# Altium PCB LED Module.PcbDoc
Units mm, origin at the board's own origin, x right, y up, seen from the top; angles counter-clockwise.
Board outline 86 x 72 mm, 2 copper layers (Top Layer, Bottom Layer), stack 1.571 mm thick; 116 components, 86 nets, 402 pads, 81 vias.
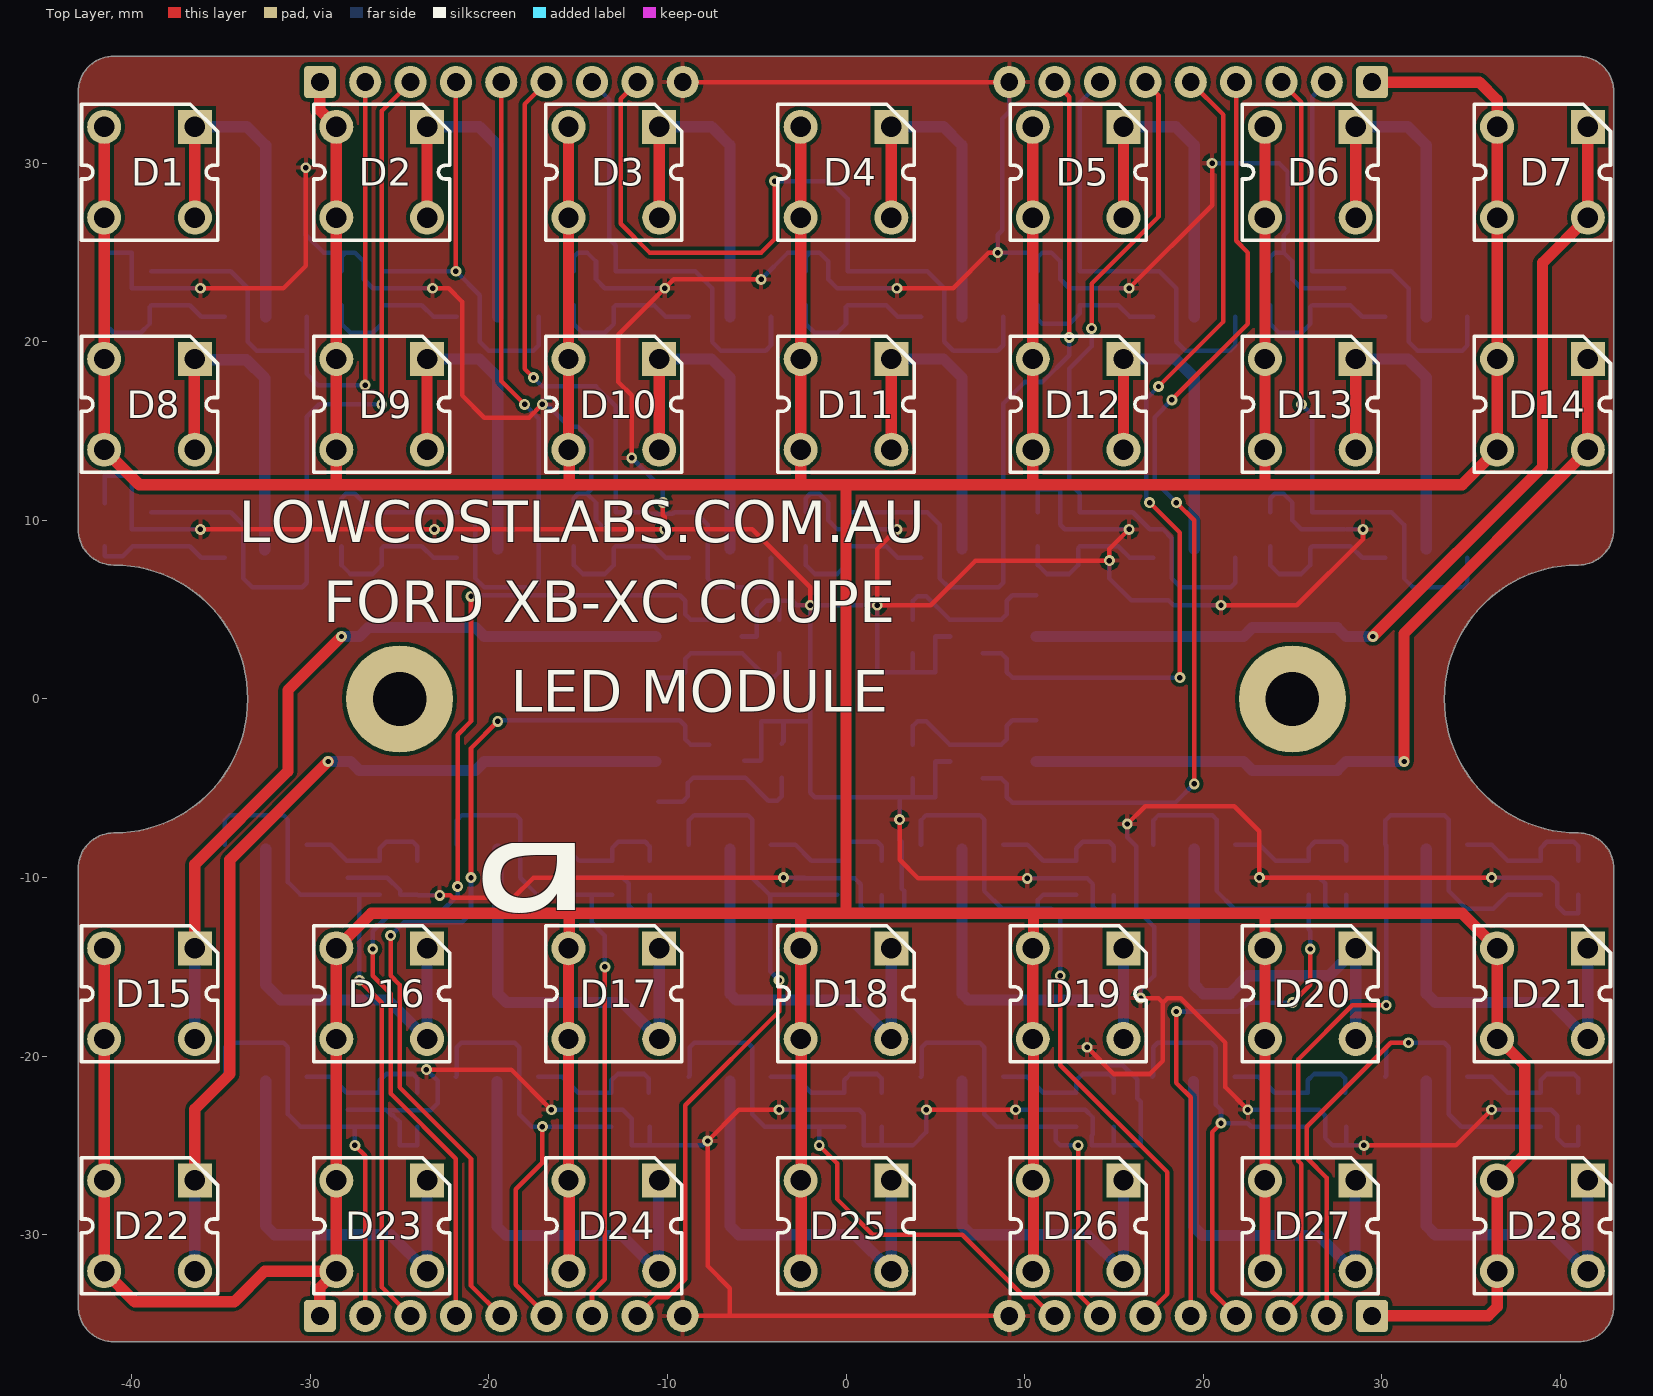
[diagram p0: Top Layer view]
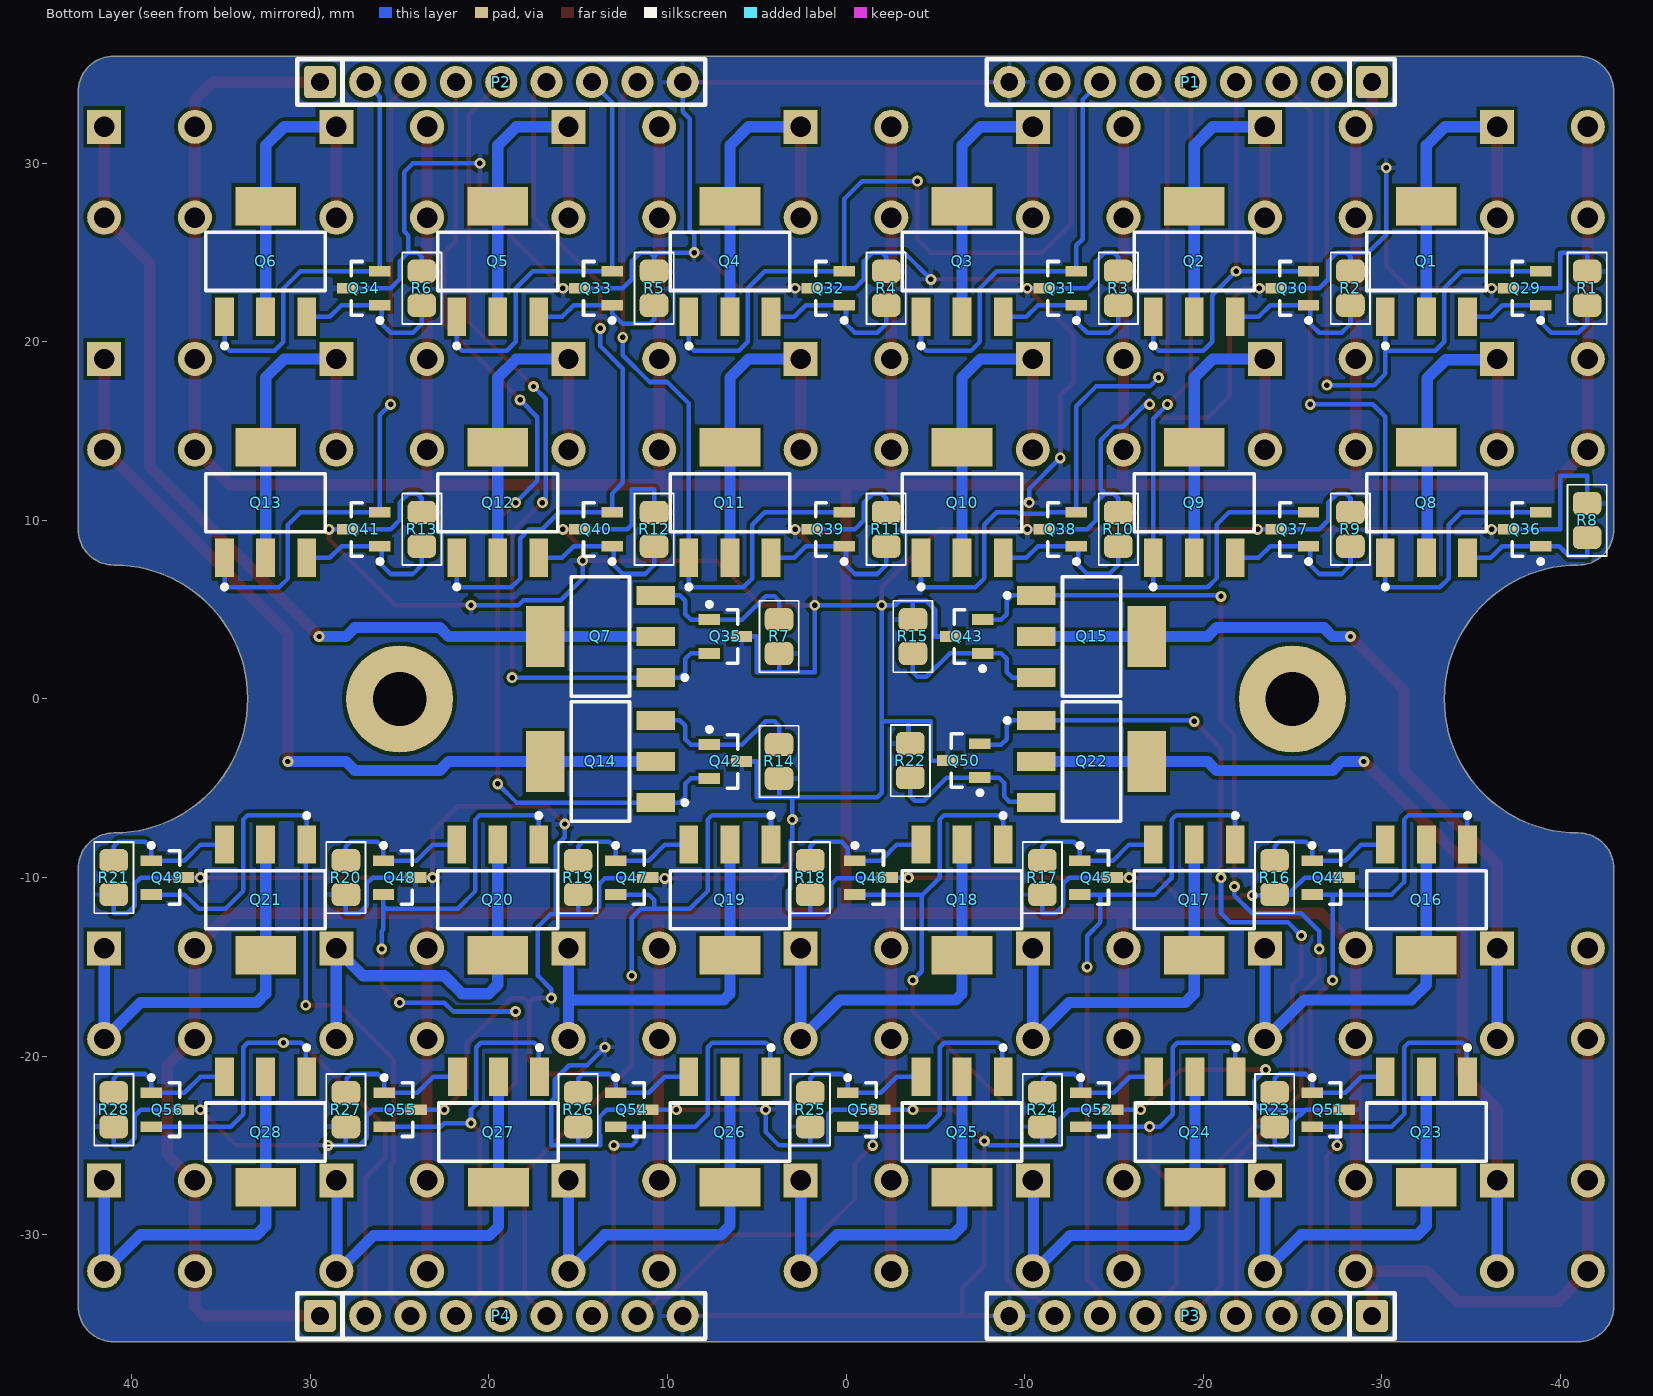
[diagram p1: Bottom Layer view, seen from below]
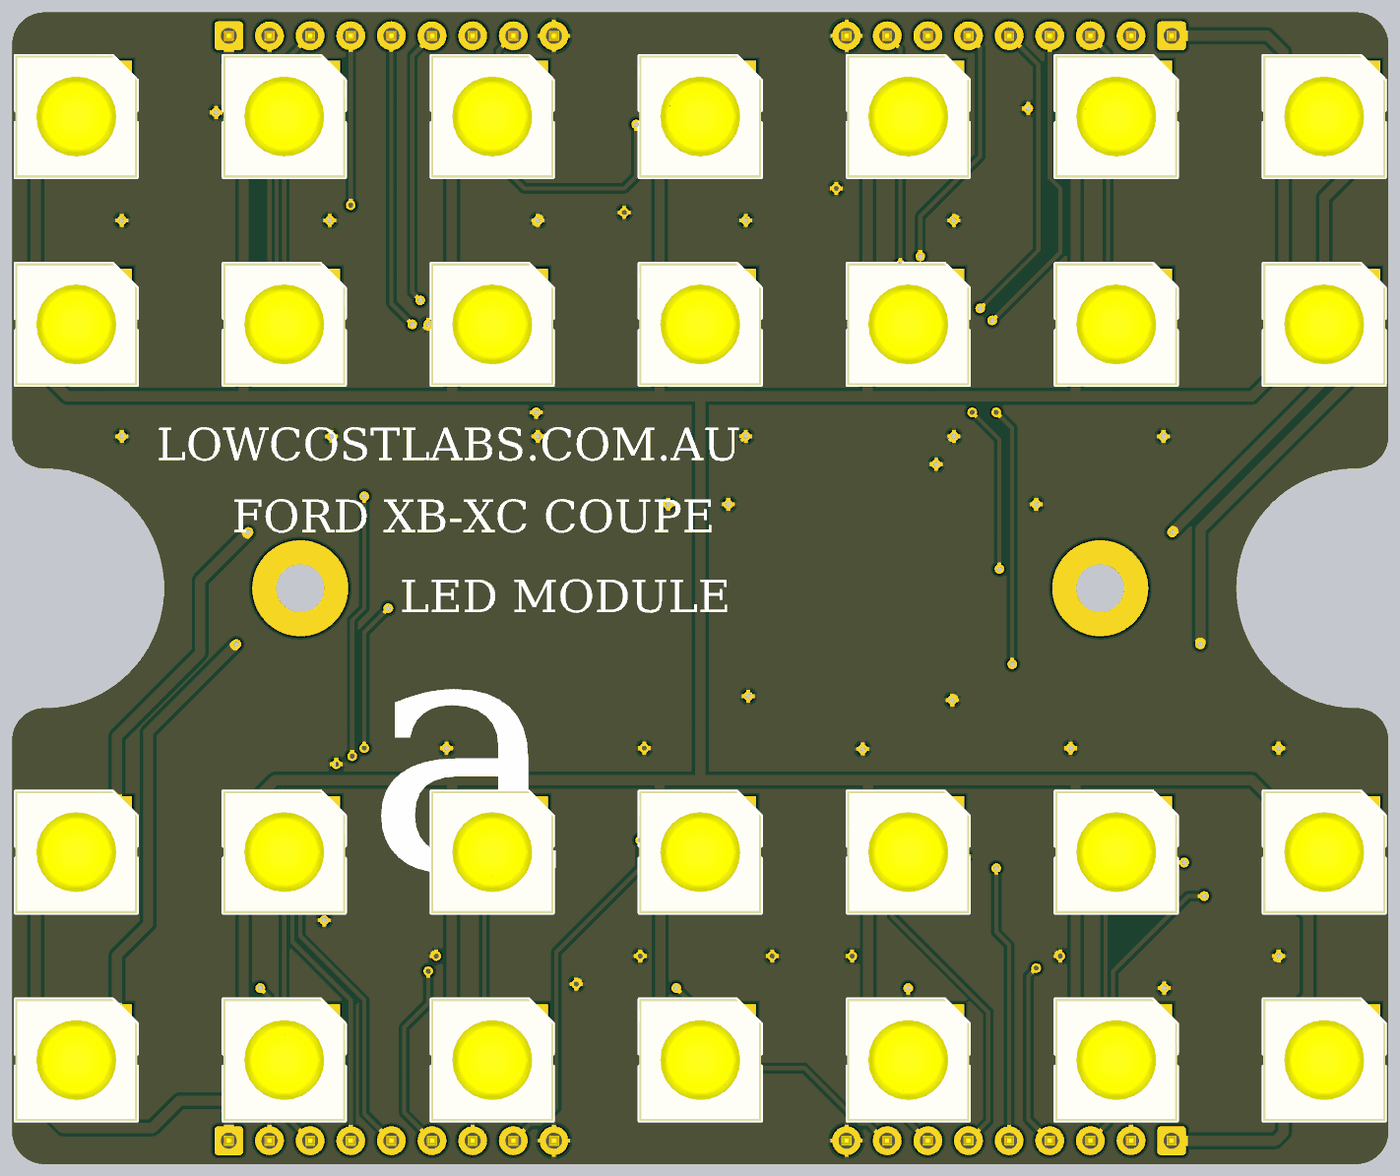
[diagram p2: 3D render of the assembled board from above, using the file's embedded part models]
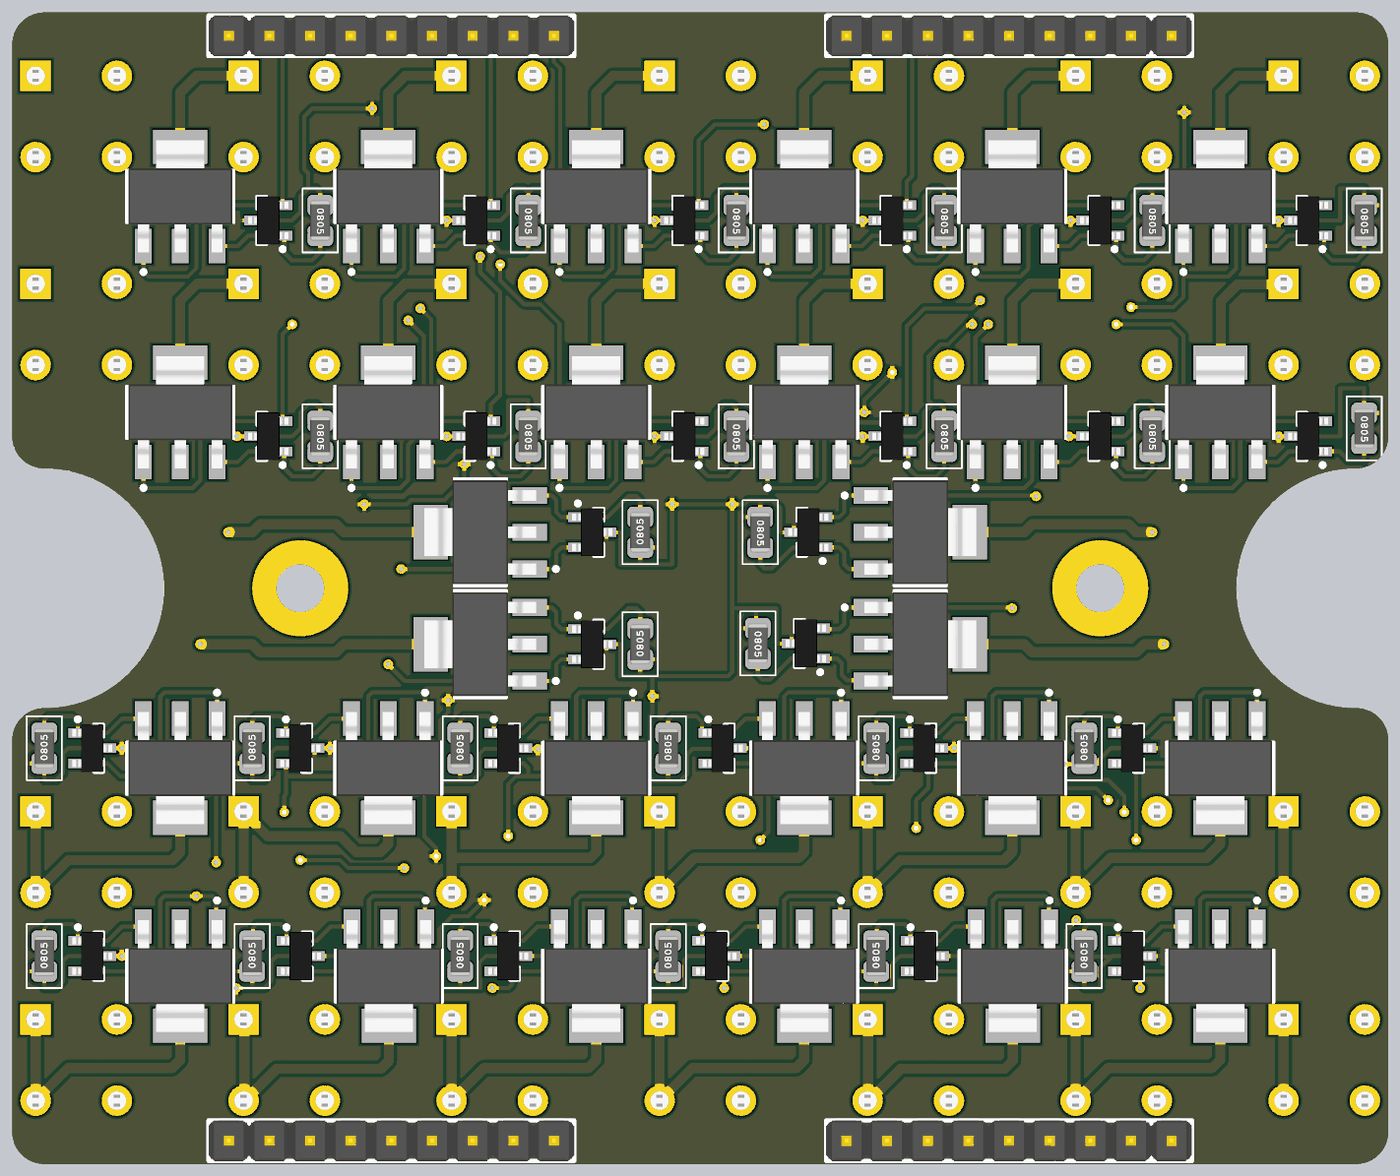
[diagram p3: 3D render of the assembled board from below, using the file's embedded part models]

## Layer stack, top to bottom
Top Solder: solder mask 0.0102, Solder Resist, Dk 3.5
Top Layer: signal copper 0.0356
Dielectric 1: dielectric 1.5, FR-4, Dk 4.8
Bottom Layer: signal copper 0.0356
Bottom Solder: solder mask 0.0102, Solder Resist, Dk 3.5

## Board outline
-43,-34 -43,-9.5 cw(c-41,-9.5) -41,-7.5 ccw(c-41,0) -41,7.5 cw(c-41,9.5) -43,9.5 -43,34 cw(c-41,34) -41,36 41,36 cw(c41,34) 43,34 43,33.5 43,9.5 cw(c41,9.5) 41,7.5 ccw(c41,0) 41,-7.5 cw(c41,-9.5) 43,-9.5 43,-34 cw(c41,-34) 41,-36 -41,-36 cw(c-41,-34)

## Design rules (kind name [scope] priority, off if disabled: settings)
Clearance [All] p1: gap=0.203
PolygonConnect [All] p1: connectstyle=Relief reliefconductorwidth=0.254 reliefentries=4 polygonreliefangle="90 Angle" airgapwidth=0.254
RoutingVias [All] p1: holewidth=0.305 width=0.61 viastyle="Through Hole" minholewidth=0.305 minwidth=0.61 maxholewidth=0.711 maxwidth=1.27
SolderMaskExpansion [All] p1: expansion=0.102
Width [All] p1: maxlimit=2.54 minlimit=0.203 preferedwidth=0.254
30 further rules are at their usual default settings.

## Classes and differential pairs
component class "XC Tail Lights": P1 P2 P3 P4
component class "Current Sinks": Q1 Q2 Q3 Q4 Q5 Q6 Q7 Q8 Q9 Q10 Q11 Q12 Q13 Q14 Q15 Q16 Q17 Q18 Q19 Q20 Q21 Q22 Q23 Q24 Q25 Q26 Q27 Q28 Q29 Q30 Q31 Q32 Q33 Q34 Q35 Q36 Q37 Q38 Q39 Q40 Q41 Q42 Q43 Q44 Q45 Q46 Q47 Q48 Q49 Q50 Q51 Q52 Q53 Q54 Q55 Q56 R1 R2 R3 R4 R5 R6 R7 R8 R9 R10 R11 R12 R13 R14 R15 R16 R17 R18 R19 R20 R21 R22 R23 R24 R25 R26 R27 R28
component class "LED Module": D1 D2 D3 D4 D5 D6 D7 D8 D9 D10 D11 D12 D13 D14 D15 D16 D17 D18 D19 D20 D21 D22 D23 D24 D25 D26 D27 D28

## Components (designator, comment, footprint, x,y, rotation, side; value= is the part's Value field where it differs from the comment)
D1 "AMBER" "CREE P4 YELLOW" -39,29.5 r270 top
D2 "AMBER" "CREE P4 YELLOW" -26,29.5 r270 top
D3 "AMBER" "CREE P4 YELLOW" -13,29.5 r270 top
D4 "AMBER" "CREE P4 YELLOW" 0,29.5 r270 top
D5 "AMBER" "CREE P4 YELLOW" 13,29.5 r270 top
D6 "AMBER" "CREE P4 YELLOW" 26,29.5 r270 top
D7 "AMBER" "CREE P4 YELLOW" 39,29.5 r270 top
D8 "AMBER" "CREE P4 YELLOW" -39,16.5 r270 top
D9 "AMBER" "CREE P4 YELLOW" -26,16.5 r270 top
D10 "AMBER" "CREE P4 YELLOW" -13,16.5 r270 top
D11 "AMBER" "CREE P4 YELLOW" 0,16.5 r270 top
D12 "AMBER" "CREE P4 YELLOW" 13,16.5 r270 top
D13 "AMBER" "CREE P4 YELLOW" 26,16.5 r270 top
D14 "AMBER" "CREE P4 YELLOW" 39,16.5 r270 top
D15 "AMBER" "CREE P4 YELLOW" -39,-16.5 r270 top
D16 "AMBER" "CREE P4 YELLOW" -26,-16.5 r270 top
D17 "AMBER" "CREE P4 YELLOW" -13,-16.5 r270 top
D18 "AMBER" "CREE P4 YELLOW" 0,-16.5 r270 top
D19 "AMBER" "CREE P4 YELLOW" 13,-16.5 r270 top
D20 "AMBER" "CREE P4 YELLOW" 26,-16.5 r270 top
D21 "AMBER" "CREE P4 YELLOW" 39,-16.5 r270 top
D22 "AMBER" "CREE P4 YELLOW" -39,-29.5 r270 top
D23 "AMBER" "CREE P4 YELLOW" -26,-29.5 r270 top
D24 "AMBER" "CREE P4 YELLOW" -13,-29.5 r270 top
D25 "AMBER" "CREE P4 YELLOW" 0,-29.5 r270 top
D26 "AMBER" "CREE P4 YELLOW" 13,-29.5 r270 top
D27 "AMBER" "CREE P4 YELLOW" 26,-29.5 r270 top
D28 "AMBER" "CREE P4 YELLOW" 39,-29.5 r270 top
P1 "Header 9" "HEADER 1X9" -19.304,34.544 r0 bottom
P2 "Header 9" "HEADER 1X9" 19.304,34.544 r180 bottom
P3 "Header 9" "HEADER 1X9" -19.304,-34.544 r0 bottom
P4 "Header 9" "HEADER 1X9" 19.304,-34.544 r180 bottom
Q1 "BCP56" SOT223 -32.5,24.5 r0 bottom
Q2 "BCP56" SOT223 -19.5,24.5 r0 bottom
Q3 "BCP56" SOT223 -6.5,24.5 r0 bottom
Q4 "BCP56" SOT223 6.5,24.5 r0 bottom
Q5 "BCP56" SOT223 19.5,24.5 r0 bottom
Q6 "BCP56" SOT223 32.5,24.5 r0 bottom
Q7 "BCP56" SOT223 13.75,3.5 r270 bottom
Q8 "BCP56" SOT223 -32.5,11 r0 bottom
Q9 "BCP56" SOT223 -19.5,11 r0 bottom
Q10 "BCP56" SOT223 -6.5,11 r0 bottom
Q11 "BCP56" SOT223 6.5,11 r0 bottom
Q12 "BCP56" SOT223 19.5,11 r0 bottom
Q13 "BCP56" SOT223 32.5,11 r0 bottom
Q14 "BCP56" SOT223 13.75,-3.5 r270 bottom
Q15 "BCP56" SOT223 -13.75,3.5 r90 bottom
Q16 "BCP56" SOT223 -32.5,-11.25 r180 bottom
Q17 "BCP56" SOT223 -19.5,-11.25 r180 bottom
Q18 "BCP56" SOT223 -6.5,-11.25 r180 bottom
Q19 "BCP56" SOT223 6.5,-11.25 r180 bottom
Q20 "BCP56" SOT223 19.5,-11.25 r180 bottom
Q21 "BCP56" SOT223 32.5,-11.25 r180 bottom
Q22 "BCP56" SOT223 -13.75,-3.5 r90 bottom
Q23 "BCP56" SOT223 -32.5,-24.25 r180 bottom
Q24 "BCP56" SOT223 -19.54,-24.25 r180 bottom
Q25 "BCP56" SOT223 -6.5,-24.25 r180 bottom
Q26 "BCP56" SOT223 6.5,-24.25 r180 bottom
Q27 "BCP56" SOT223 19.46,-24.25 r180 bottom
Q28 "BCP56" SOT223 32.5,-24.25 r180 bottom
Q29 "S8 050" SOT23-3L -38,23 r0 bottom
Q30 "S8 050" SOT23-3L -25,23 r0 bottom
Q31 "S8 050" SOT23-3L -12,23 r0 bottom
Q32 "S8 050" SOT23-3L 1,23 r0 bottom
Q33 "S8 050" SOT23-3L 14,23 r0 bottom
Q34 "S8 050" SOT23-3L 27,23 r0 bottom
Q35 "S8 050" SOT23-3L 6.75,3.5 r180 bottom
Q36 "S8 050" SOT23-3L -38,9.5 r0 bottom
Q37 "S8 050" SOT23-3L -25,9.5 r0 bottom
Q38 "S8 050" SOT23-3L -12,9.5 r0 bottom
Q39 "S8 050" SOT23-3L 1,9.5 r0 bottom
Q40 "S8 050" SOT23-3L 14,9.5 r0 bottom
Q41 "S8 050" SOT23-3L 27,9.5 r0 bottom
Q42 "S8 050" SOT23-3L 6.75,-3.5 r180 bottom
Q43 "S8 050" SOT23-3L -6.75,3.5 r0 bottom
Q44 "S8 050" SOT23-3L -27,-10 r180 bottom
Q45 "S8 050" SOT23-3L -14,-10 r180 bottom
Q46 "S8 050" SOT23-3L -1.4,-10 r180 bottom
Q47 "S8 050" SOT23-3L 12,-10 r180 bottom
Q48 "S8 050" SOT23-3L 25,-10 r180 bottom
Q49 "S8 050" SOT23-3L 38,-10 r180 bottom
Q50 "S8 050" SOT23-3L -6.6,-3.45 r0 bottom
Q51 "S8 050" SOT23-3L -27,-23 r180 bottom
Q52 "S8 050" SOT23-3L -14.04,-23 r180 bottom
Q53 "S8 050" SOT23-3L -1,-23 r180 bottom
Q54 "S8 050" SOT23-3L 12,-23 r180 bottom
Q55 "S8 050" SOT23-3L 24.96,-23 r180 bottom
Q56 "S8 050" SOT23-3L 38,-23 r180 bottom
R1 "9R1" "RESISTOR 0805" -41.5,23 r90 bottom
R2 "9R1" "RESISTOR 0805" -28.25,23 r90 bottom
R3 "9R1" "RESISTOR 0805" -15.25,23 r90 bottom
R4 "9R1" "RESISTOR 0805" -2.25,23 r90 bottom
R5 "9R1" "RESISTOR 0805" 10.75,23 r90 bottom
R6 "9R1" "RESISTOR 0805" 23.75,23 r90 bottom
R7 "9R1" "RESISTOR 0805" 3.75,3.5 r270 bottom
R8 "9R1" "RESISTOR 0805" -41.5,10 r90 bottom
R9 "9R1" "RESISTOR 0805" -28.25,9.5 r90 bottom
R10 "9R1" "RESISTOR 0805" -15.25,9.5 r90 bottom
R11 "9R1" "RESISTOR 0805" -2.25,9.5 r90 bottom
R12 "9R1" "RESISTOR 0805" 10.75,9.5 r90 bottom
R13 "9R1" "RESISTOR 0805" 23.75,9.5 r90 bottom
R14 "9R1" "RESISTOR 0805" 3.75,-3.5 r270 bottom
R15 "9R1" "RESISTOR 0805" -3.75,3.5 r90 bottom
R16 "9R1" "RESISTOR 0805" -24,-10 r270 bottom
R17 "9R1" "RESISTOR 0805" -11,-10 r270 bottom
R18 "9R1" "RESISTOR 0805" 2,-10 r270 bottom
R19 "9R1" "RESISTOR 0805" 15,-10 r270 bottom
R20 "9R1" "RESISTOR 0805" 28,-10 r270 bottom
R21 "9R1" "RESISTOR 0805" 41,-10 r270 bottom
R22 "9R1" "RESISTOR 0805" -3.6,-3.45 r90 bottom
R23 "9R1" "RESISTOR 0805" -24,-23 r270 bottom
R24 "9R1" "RESISTOR 0805" -11,-23 r270 bottom
R25 "9R1" "RESISTOR 0805" 2,-23 r270 bottom
R26 "9R1" "RESISTOR 0805" 15,-23 r270 bottom
R27 "9R1" "RESISTOR 0805" 28,-23 r270 bottom
R28 "9R1" "RESISTOR 0805" 41,-23 r270 bottom

## Footprints (in the part's own frame and the unit in brackets; to place one, negate y for a bottom-side part, rotate by r counter-clockwise, add the part's x,y. Pads: shape width x height; smd on the part's side, far side on the other; paste and mask are expansions set on the pad)
"CREE P4 YELLOW" [mil] "CREE P4 YELLOW"
  rect 75x75 hole 45: 1(-100,100)
  round 75 hole 45: 2(-100,-100) 3(100,-100) 4(100,100)
  silkscreen extent -150,-150 150,150, body extent -150,-150 150,150, height 272
"HEADER 1X9" [mm]
  rrect25% 1.8x1.8 hole 1: 1(-10.16,0)
  round 1.8 hole 1: 2(-7.62,0) 3(-5.08,0) 4(-2.54,0) 5(0,0) 6(2.54,0) 7(5.08,0) 8(7.62,0) 9(10.16,0)
  silkscreen extent -11.43,-1.27 11.43,1.27, body extent -11.43,-1.27 11.43,1.27, height 9.5
"RESISTOR 0805" [mm]
  rrect50% 1.3x1.6 smd: 1(0.95,0) 2(-0.95,0)
  silkscreen extent -2,-1.1 2,1.1, body extent -1.25,-0.62 1.25,0.62, height 0.8
SOT23-3L [mm] "SOT23, 3-Leads, Body 2.9x1.3mm, Pitch 0.95mm, Lead Span 2.5mm, IPC High Density"
  rect 1.2x0.6 smd: 1(-0.9,0.95) 2(-0.9,-0.95) 3(0.9,0)
  silkscreen extent -1.02,-1.5 0.7,1.92, body extent -1.25,-1.5 1.25,1.5, height 1.12
SOT223 [mm] "SOT-223/SC-73; 4 Leads; Body 6.7 x 7.3 mm, inc. leads (LxW max)"
  rect 1.05x2.15 smd: 1(2.3,3.1) 2(0,3.1) 3(-2.3,3.1)
  rect 3.4x2.15 smd: 2(0,-3.1)
  silkscreen extent -3.35,-1.62 3.35,4.85, body extent -3.25,-3.5 3.25,3.5, height 1.67

## Part data
D1 D2 D3 D4 D5 D6 D7 D8 D9 D10 D11 D12 D13 D14 D15 D16 D17 D18 D19 D20 D21 D22 D23 D24 D25 D26 D27 D28: library part CP41B-AFSCM0Q0264, "CREE AMBER LED P4 (SUPERFLUX)"
P1 P2 P3 P4: "Header, 9-Pin"
Q1 Q2 Q3 Q4 Q5 Q6 Q7 Q8 Q9 Q10 Q11 Q12 Q13 Q14 Q15 Q16 Q17 Q18 Q19 Q20 Q21 Q22 Q23 Q24 Q25 Q26 Q27 Q28 Q29 Q30 Q31 Q32 Q33 Q34 Q35 Q36 Q37 Q38 Q39 Q40 Q41 Q42 Q43 Q44 Q45 Q46 Q47 Q48 Q49 Q50 Q51 Q52 Q53 Q54 Q55 Q56: library part NPN, "BCP56 80 V, 1 A NPN medium power transistors"
R1 R2 R3 R4 R5 R6 R7 R8 R9 R10 R11 R12 R13 R14 R15 R16 R17 R18 R19 R20 R21 R22 R23 R24 R25 R26 R27 R28: library part Res2, "Resistor"

## Free pads (board coordinates)
  round 6 hole 3: MOUNT(-25,0) MOUNT(25,0)

## Via types
v1: diameter 0.61, hole 0.305, Top Layer to Bottom Layer, 81 vias

## Nets (pads, with @x,y where several pads share a name; then routed paths per layer and width w, separated by ;. In a path a pad name is that pad's centre, name@x,y a point inside that pad or via, vN(x,y) a via of type N, cw(c..) or ccw(c..) an arc to the next point about the centre after c; other vN are vias at no path point)
5V: D1.2 D1.3 D2.2 D2.3 D3.2 D3.3 D4.2 D4.3 D5.2 D5.3 D6.2 D6.3 D7.2 D7.3 D8.2 D8.3 D9.2 D9.3 D10.2 D10.3 D11.2 D11.3 D12.2 D12.3 D13.2 D13.3 D14.2 D14.3 D15.2 D15.3 D16.2 D16.3 D17.2 D17.3 D18.2 D18.3 D19.2 D19.3 D20.2 D20.3 D21.2 D21.3 D22.2 D22.3 D23.2 D23.3 D24.2 D24.3 D25.2 D25.3 D26.2 D26.3 D27.2 D27.3 D28.2 D28.3 P1.1 P2.1 P3.1 P4.1 | length 480
  Top Layer w0.635: D15.2 D22.3 -39.83,-33.75 -34.25,-33.75 -32.54,-32.04 D23.3 ; D1.2 D8.2 D8.3 -39.58,12 -15.5,12 ; P3.1 -29.464,-32.964 D23.3 ; P1.1 -29.464,32.964 D2.2 D2.3 D9.3 -28.54,12.04 ; D24.2@-15.54,-26.46 D17.2 -15.5,-13.92 -15.5,-12 ; D10.3@-15.54,14.04 D10.2 D3.2 ; D24.3@-15.5,-32 D24.2@-15.5,-26.46 ; D10.3@-15.5,14 -15.5,12 ; D18.3@-2.54,-18.96 D18.2 -2.54,-12.04 ; -2.54,12.04 -2.54,31.96 D4.2@-2.5,32 ; D25.3@-2.5,-32 D18.3@-2.5,-19.5 ; D26.3@10.5,-32 10.5,-19 10.46,-18.96 D19.2 10.5,-13.92 10.5,-12 ; D5.2@10.5,32 10.46,31.96 D12.2 10.46,12 ; D27.3 D20.3 D20.2 23.46,-12 ; D6.2@23.5,32.25 23.46,32.21 D6.3 D13.3 23.46,12 ; P4.1 35.956,-34.544 36.46,-34.04 D28.3 36.46,-27.04 38,-25.5 38,-20.5 36.54,-19.04 D21.3 D21.2 34.5,-12 23.46,-12 ; P2.1 35.456,34.544 36.46,33.54 D7.2 D7.3 D14.3 34.5,12 23.46,12 ; D23.3 D16.3 D16.2 -26.58,-12 -15.5,-12 ; -15.5,-12 0,-12 ; -15.5,12 0,12 ; 0,-12 10.5,-12 ; 0,-12 0,12 ; 0,12 10.46,12 ; 10.46,12 23.46,12 ; 10.5,-12 23.46,-12
DRIVE_0: P1.2 Q1.1 Q29.2 | length 36
  Top Layer w0.254: v1(-26.924,17.576) P1.2
  Bottom Layer w0.254: Q29.2 -34.45,23.95 -33.5,23 -33.5,20 -33,19.5 -30.2,19.5 ; Q1.1 -30.2,19.5 ; v1(-26.924,17.576) -29.576,17.576 -30.2,18.2 -30.2,19.5
DRIVE_1: P1.4 Q2.1 Q30.2 | length 24.5
  Top Layer w0.254: v1@-21.844,23.844 v1(-21.844,23.952) P1.4
  Bottom Layer w0.254: Q30.2 v1@-21.842,23.95 ; v1(-21.844,23.952) v1@-21.842,23.95 ; Q2.1 -17.2,19.8 -17.5,19.5 -20,19.5 -20.5,20 -20.5,22.608 v1@-21.842,23.95
DRIVE_2: P1.7 Q3.1 Q31.2 | length 25.2
  Bottom Layer w0.254: P1.7 -13.25,33.57 -13.25,25.75 -12.9,25.4 Q31.2 -8.45,23.95 -7.5,23 -7.5,20 -7,19.5 -4.5,19.5 -4.2,19.8 Q3.1
DRIVE_3: P1.8 Q4.1 Q32.2 | length 43.7
  Top Layer w0.254: P1.8 -12.615,33.613 -12.615,26.615 -11,25 -4.75,25 -4,25.75 v1(-4,29)
  Bottom Layer w0.254: v1(-4,29) -0.9,29 0.1,28 Q32.2 4.55,23.95 5.5,23 5.5,20 6,19.5 8.5,19.5 8.8,19.8 Q4.1
DRIVE_4: P2.7 Q5.1 Q33.2 | length 25.1
  Bottom Layer w0.254: P2.7 13.1,33.42 Q33.2 17.55,23.95 18.5,23 18.5,20 19,19.5 21.5,19.5 21.8,19.8 Q5.1
DRIVE_5: P2.2 Q6.1 Q34.2 | length 25
  Bottom Layer w0.254: P2.2 26.1,33.72 Q34.2 30.55,23.95 31.5,23 31.5,20 32,19.5 34.5,19.5 34.8,19.8 Q6.1
DRIVE_6: P2.5 Q7.1 Q35.2 | length 48.7
  Top Layer w0.254: v1(17,11) 18.7,9.3 v1(18.7,1.2) ; v1(17.5,17.5) 21.135,21.135 21.135,32.713 P2.5
  Bottom Layer w0.254: Q35.2 8.7,2.55 9,2.25 9,1.5 9.3,1.2 Q7.1 v1(18.7,1.2) ; v1(17,11) 16.823,11.177 16.823,16.823 v1(17.5,17.5)
DRIVE_7: P1.3 Q8.1 Q36.2 | length 44.8
  Top Layer w0.254: v1(-26,16.5) -26,32.928 P1.3
  Bottom Layer w0.254: Q36.2 -34.45,10.45 -33.75,9.75 -33.75,6.75 -33.25,6.25 -30.45,6.25 -30.2,6.5 Q8.1 -30.2,15.8 -29.5,16.5 v1(-26,16.5)
DRIVE_8: P1.5 Q9.1 Q37.2 | length 41.2
  Top Layer w0.254: P1.5 -19.304,17.804 v1(-18,16.5)
  Bottom Layer w0.254: Q37.2 -21.45,10.45 -20.75,9.75 -20.75,6.75 -20.257,6.257 -17.443,6.257 -17.2,6.5 Q9.1 -17.2,15.7 v1(-18,16.5)
DRIVE_9: P1.6 Q10.1 Q38.2 | length 42.2
  Top Layer w0.254: v1(-17.5,18) -18,18.5 -18,33.308 P1.6
  Bottom Layer w0.254: v1(-17.5,18) -17,17.5 -14,17.5 -12.9,16.4 Q38.2 -11.335,10.45 -11.25,10.365 -9.7,10.365 -9.615,10.45 -8.45,10.45 -7.75,9.75 -7.75,6.75 -7.25,6.25 -4.45,6.25 -4.2,6.5 Q10.1
DRIVE_10: P2.8 Q11.1 Q39.2 | length 42.8
  Top Layer w0.254: P2.8 12.5,33.728 v1(12.5,20.25)
  Bottom Layer w0.254: Q39.2 4.55,10.45 5.25,9.75 5.25,6.75 5.75,6.25 8.55,6.25 8.8,6.5 Q11.1 8.8,16.55 10,17.75 11,17.75 12.5,19.25 v1(12.5,20.25)
DRIVE_11: P2.6 Q12.1 Q40.2 | length 40
  Top Layer w0.254: v1(13.75,20.75) 13.75,23.25 17.5,27 17.5,33.808 P2.6
  Bottom Layer w0.254: v1(13.75,20.75) 13.75,19.75 12.5,18.5 12.5,12.1 13.1,11.5 Q40.2 16.05,10.45 17,9.5 17.75,9.5 18.25,9 18.25,6.75 18.75,6.25 21.55,6.25 21.8,6.5 Q12.1
DRIVE_12: P2.3 Q13.1 Q41.2 | length 38.5
  Top Layer w0.254: P2.3 25.5,33.428 v1(25.5,16.5)
  Bottom Layer w0.254: v1(25.5,16.5) 26.1,15.9 Q41.2 30.55,10.45 31.25,9.75 31.25,6.75 31.75,6.25 34.55,6.25 34.8,6.5 Q13.1
DRIVE_13: P2.4 Q14.1 Q42.2 | length 55.9
  Top Layer w0.254: v1(18.25,16.75) 22.5,21 22.5,25 21.844,25.656 P2.4 ; v1(18.5,11) 19.5,10 v1(19.5,-4.75)
  Bottom Layer w0.254: Q42.2 8.7,-4.45 9,-4.75 9,-5.5 9.3,-5.8 Q14.1 18.45,-5.8 v1(19.5,-4.75) ; v1(18.25,16.75) 17.28,15.78 17.28,12.22 v1(18.5,11)
DRIVE_14: P3.4 Q15.1 Q43.2 | length 60.5
  Top Layer w0.254: v1(-26.5,-14) -26.5,-15.5 -25.5,-16.5 -25.5,-22.094 -21.844,-25.75 P3.4 ; v1(-21.75,-10.5) -21.75,-2 -21,-1.25 v1(-21,5.75)
  Bottom Layer w0.254: v1(-26.5,-14) -26.5,-13 -25.5,-12 -22.75,-12 -21.75,-11 v1(-21.75,-10.5) ; v1@-21,5.8 Q15.1 -9.3,5.8 -9,5.5 -9,4.75 -8.7,4.45 Q43.2
DRIVE_15: P3.3 Q16.1 Q44.2 | length 38.8
  Top Layer w0.254: v1(-27.25,-15.75) -26,-17 -26,-32.928 P3.3
  Bottom Layer w0.254: Q16.1 -34.8,-6.8 -34.5,-6.5 -31.5,-6.5 -31.25,-6.75 -31.25,-10.25 -30.55,-10.95 -27.25,-10.95 ; v1(-27.25,-15.75) -27.25,-10.95 ; Q44.2 -27.25,-10.95
DRIVE_16: P3.7 Q17.1 Q45.2 | length 38.1
  Top Layer w0.254: P3.7 -14.224,-33.224 -13.5,-32.5 v1(-13.5,-15)
  Bottom Layer w0.254: Q17.1 -21.8,-6.8 -21.5,-6.5 -18.5,-6.5 -18.25,-6.75 -18.25,-10 -17.3,-10.95 -14.25,-10.95 ; v1(-13.5,-15) -13.5,-13.25 -14.25,-12.5 -14.25,-10.95 ; Q45.2 -14.25,-10.95
DRIVE_17: P3.8 Q18.1 Q46.2 | length 41
  Top Layer w0.254: P3.8 -10.64,-33.5 -10,-33.5 -9,-32.5 -9,-22.75 -3.75,-17.5 v1(-3.75,-15.75)
  Bottom Layer w0.254: Q18.1 -8.8,-6.8 -8.5,-6.5 -5.5,-6.5 -5.25,-6.75 -5.25,-10 -4.3,-10.95 ; v1(-3.75,-15.75) -4.25,-15.25 -4.25,-11 -4.3,-10.95 ; Q46.2 -4.3,-10.95
DRIVE_18: P4.6 Q19.1 Q47.2 | length 42.1
  Top Layer w0.254: v1(12,-15.5) 12,-20.5 18,-26.5 18,-33.308 P4.6
  Bottom Layer w0.254: Q19.1 4.2,-6.8 4.5,-6.5 7.5,-6.5 7.75,-6.75 7.75,-10.75 8.75,-11.75 10.75,-11.75 ; v1(12,-15.5) 12,-12.25 11.5,-11.75 10.75,-11.75 ; Q47.2 11.05,-10.95 10.75,-11.25 10.75,-11.75
DRIVE_19: P4.5 Q20.1 Q48.2 | length 45.3
  Top Layer w0.254: v1(18.5,-17.5) 18.5,-21.5 19.304,-22.304 P4.5 ; v1(25,-17) 26,-16 v1(26,-14)
  Bottom Layer w0.254: Q20.1 17.2,-6.8 17.5,-6.5 20.5,-6.5 20.75,-6.75 20.75,-10.75 21.75,-11.75 25.75,-11.75 25.9,-11.6 ; v1(18.5,-17.5) 22,-17.5 22.5,-17 v1(25,-17) ; Q48.2 25.9,-11.6 ; v1(26,-14) 26,-13 25.9,-12.9 25.9,-11.6
DRIVE_20: P4.3 Q21.1 Q49.2 | length 45.1
  Top Layer w0.254: P4.3 25.5,-33.428 25.5,-26.043 25.336,-25.879 25.336,-20.164 28.352,-17.148 v1(30.25,-17.148)
  Bottom Layer w0.254: v1(30.25,-17.148) 30.25,-8.2 Q21.1 30.2,-6.8 30.5,-6.5 33.5,-6.5 33.75,-6.75 33.75,-10.75 34.75,-11.75 36.25,-11.75 37.05,-10.95 Q49.2
DRIVE_21: P3.5 Q22.1 Q50.2 | length 53.1
  Top Layer w0.254: v1(-25.5,-13.25) -25.5,-15.5 -25,-16 -25,-21.75 -21,-25.75 -21,-32.848 P3.5 ; v1(-21,-10) -21,-2.75 v1(-19.5,-1.25)
  Bottom Layer w0.254: v1(-25.5,-13.25) -24.75,-12.5 -21.5,-12.5 -21,-12 v1(-21,-10) ; v1(-19.5,-1.25) -19.45,-1.2 Q22.1 -9.3,-1.2 -9,-1.5 -9,-2.25 -8.7,-2.55 Q50.2@-7.65,-2.55
DRIVE_22: P3.2 Q23.1 Q51.2 | length 25.4
  Top Layer w0.254: v1(-27.5,-25) -26.924,-25.576 P3.2
  Bottom Layer w0.254: Q23.1 -34.75,-21.1 -34.75,-19.5 -34.5,-19.25 -31.5,-19.25 -31.25,-19.5 -31.25,-23.25 -30.55,-23.95 -27.5,-23.95 ; v1(-27.5,-25) -27.5,-23.95 ; Q51.2 -27.5,-23.95
DRIVE_23: P3.6 Q24.1 Q52.2 | length 26.5
  Top Layer w0.254: v1(-17,-23.95) -17,-25.96 -18.5,-27.46 -18.5,-32.808 P3.6
  Bottom Layer w0.254: Q24.1 -21.79,-21.1 -21.79,-19.5 -21.54,-19.25 -18.54,-19.25 -18.29,-19.5 -18.29,-23.25 -17.59,-23.95 v1(-17,-23.95) Q52.2
DRIVE_24: P4.8 Q25.1 Q53.2 | length 33.9
  Top Layer w0.254: v1(-1.5,-25) -0.5,-26 -0.5,-28 1.5,-30 6.5,-30 10,-33.5 10.5,-33.5 11.544,-34.544 P4.8
  Bottom Layer w0.254: Q25.1 -8.75,-21.1 -8.75,-19.5 -8.5,-19.25 -5.5,-19.25 -5.25,-19.5 -5.25,-23.25 -4.55,-23.95 -1.5,-23.95 ; v1(-1.5,-25) -1.5,-23.95 ; Q53.2 -1.5,-23.95
DRIVE_25: P4.7 Q26.1 Q54.2 | length 26.8
  Top Layer w0.254: v1(13,-25) 13,-33.32 P4.7
  Bottom Layer w0.254: Q26.1 4.25,-21.1 4.25,-19.5 4.5,-19.25 7.5,-19.25 7.75,-19.5 7.75,-23.25 8.45,-23.95 11.75,-23.95 ; Q54.2 11.75,-23.95 ; v1(13,-25) 12,-25 11.75,-24.75 11.75,-23.95
DRIVE_26: P4.4 Q27.1 Q55.2 | length 26.2
  Top Layer w0.254: v1(21,-23.75) 20.5,-24.25 20.5,-33.2 P4.4
  Bottom Layer w0.254: Q27.1 17.21,-21.1 17.21,-19.5 17.46,-19.25 20.46,-19.25 20.71,-19.5 20.71,-22.71 21,-23 v1(21,-23.75) 22.5,-23.75 22.7,-23.95 Q55.2
DRIVE_27: P4.2 Q28.1 Q56.2 | length 33.3
  Top Layer w0.254: P4.2 26.924,-26.821 25.793,-25.689 25.793,-23.957 30.5,-19.25 v1(31.5,-19.25)
  Bottom Layer w0.254: Q28.1 30.25,-21.1 30.25,-19.5 30.5,-19.25 v1(31.5,-19.25) 33.5,-19.25 33.75,-19.5 33.75,-23.25 34.45,-23.95 Q56.2
GND: P1.9 P2.9 P3.9 P4.9 Q29.3 Q30.3 Q31.3 Q32.3 Q33.3 Q34.3 Q35.3 Q36.3 Q37.3 Q38.3 Q39.3 Q40.3 Q41.3 Q42.3 Q43.3 Q44.3 Q45.3 Q46.3 Q47.3 Q48.3 Q49.3 Q50.3 Q51.3 Q52.3 Q53.3 Q54.3 Q55.3 Q56.3 R1.1 R2.1 R3.1 R4.1 R5.1 R6.1 R7.1 R8.1 R9.1 R10.1 R11.1 R12.1 R13.1 R14.1 R15.1 R16.1 R17.1 R18.1 R19.1 R20.1 R21.1 R22.1 R23.1 R24.1 R25.1 R26.1 R27.1 R28.1 | length 595.8
  Top Layer w0.254: v1(-36.15,9.5) v1(-23.05,9.5) v1(-10.15,9.5) ; v1(-36.15,23) -31.5,23 -30.25,24.25 v1(-30.25,29.75) ; v1(-23.5,-20.75) -18.75,-20.75 v1(-16.5,-23) ; v1(-23.15,23) -22.25,23 -21.5,22.25 -21.5,17 -20.25,15.75 -17.75,15.75 v1(-17,16.5) ; v1(-22.75,-11) -22.148,-11 -22.013,-11.135 -18.635,-11.135 -17.5,-10 v1(-15.85,-10) v1(-3.5,-10) ; v1(-12,13.5) -12,17 -12.75,17.75 -12.75,20.4 v1(-10.15,23) -9.65,23.5 v1(-4.75,23.5) ; v1(-10.25,11) -10.25,10.3 -10.15,10.2 v1(-10.15,9.5) ; P3.9 -6.5,-34.544 ; P1.9 P2.9 ; v1(-3.75,-23) -6,-23 v1(-7.75,-24.75) -7.75,-31.75 -6.5,-33 -6.5,-34.544 ; v1(-2,5.25) -2,6.25 -5.25,9.5 v1(-10.15,9.5) ; v1(2.85,9.5) 1.75,8.4 v1(1.75,5.25) 4.75,5.25 7.25,7.75 v1(14.75,7.75) 14.75,8.4 v1(15.85,9.5) ; v1(2.85,23) 6,23 8,25 v1(8.5,25) ; v1(3,-6.75) 3,-9 4.05,-10.05 v1(10.15,-10.05) ; v1(4.5,-23) v1(9.5,-23) ; P4.9 -6.5,-34.544 ; v1(13.5,-19.5) 15,-21 17,-21 17.75,-20.25 17.75,-17 ; v1(15.75,-7) 16.75,-6 21.75,-6 23.15,-7.4 v1(23.15,-10) v1(36.15,-10) ; v1(15.85,23) 20.5,27.65 v1(20.5,30) ; v1(16.5,-16.75) 17.5,-16.75 17.75,-17 ; v1(21,5.25) 25.25,5.25 28.95,8.95 v1(28.95,9.5) ; v1(22.5,-23) 21.25,-21.75 21.25,-19.25 18.75,-16.75 18,-16.75 17.75,-17 ; v1(29,-25) 34.15,-25 v1(36.15,-23)
  Bottom Layer w0.254: R8.1 -41.5,12.5 -40,12.5 -40,9.5 Q36.3 v1(-36.15,9.5) ; R1.1 -41.5,25 -40,25 -40,23 Q29.3 v1(-36.15,23) ; v1(-30.25,29.75) -30.25,26 -29.25,25 -28,25 ; R9.1 -28.25,11.25 -28,11.5 -27.5,11.5 -27,11 -27,10 -26.5,9.5 Q37.3 ; R2.1 -28.25,24.75 -28,25 ; Q51.3 -25.75,-23 -25.72,-23.03 ; Q44.3 -25.683,-10 -24.95,-10.733 -24.95,-10.95 R16.1 ; R23.1 -24,-25 -25,-25 -25,-23.683 -25.363,-23.32 -25.43,-23.32 -25.72,-23.03 ; Q37.3@-24,9.5 v1(-23.05,9.5) ; R16.1@-23.95,-11 v1(-22.75,-11) ; v1(-23.5,-20.75) -22.87,-21.38 -22.87,-22.646 -23.254,-23.03 -25.72,-23.03 ; v1(-23.15,23) Q30.3 -26.5,23 -27,23.5 -27,24.5 -27.5,25 -28,25 ; v1(-17,16.5) -17,16.75 -15.493,15.243 -15.009,15.243 -14.257,14.491 -14.257,11.743 -14.5,11.5 ; v1(-16.5,-23) Q52.3 -12.5,-23 -12,-23.5 -12,-25 -11,-25 ; v1(-15.85,-10) Q45.3 -12.5,-10 -12.17,-10.33 -12.17,-11.58 -11.75,-12 -11,-12 R17.1 ; R10.1 -15.25,11.25 -15,11.5 -14.5,11.5 ; R3.1 -15.25,24.75 -15,25 -14.5,25 -14,24.5 -14,23.5 -13.5,23 Q31.3 v1(-10.15,23) ; v1(-12,13.5) -10.25,11.75 v1(-10.25,11) ; R24.1 -11,-25 ; v1(-10.15,9.5) Q38.3 -13.5,9.5 -14,10 -14,11 -14.5,11.5 ; v1(-7.75,-24.75) -8,-25 -11,-25 ; Q43.3 -5,3.5 -5,5 -4.5,5.5 -3.75,5.5 ; Q50.3 -4.8,-3.45 -4.75,-3.4 -4.75,-1.25 -3.5,-1.25 ; v1(-4.75,23.5) -3.25,25 -2,25 ; v1(-3.75,-23) Q53.3 0.75,-23 1,-23.25 1,-25 2,-25 ; R15.1 -3.75,5.5 ; R22.1 -3.5,-2.4 -3.5,-1.25 ; v1(-3.5,-10) Q46.3 ; Q46.3@-2.85,-10.05 0.5,-10.05 0.83,-10.38 0.83,-11.63 1.25,-12.05 2,-12.05 ; R11.1 -2.25,11.25 -2,11.5 -1.5,11.5 -1,11 -1,10 -0.5,9.5 Q39.3 v1(2.85,9.5) ; R4.1 -2.25,24.75 -2,25 ; R25.1 2,-25 ; R18.1@2,-11 2,-12.05 ; v1(2.85,23) Q32.3 -0.5,23 -1,23.5 -1,24.5 -1.5,25 -2,25 ; R14.1 3.75,-5.5 ; R7.1 3.75,1.5 ; v1(4.5,-23) 4.5,-24.25 3.75,-25 2,-25 ; Q42.3 5,-3.5 5,-5.5 3.75,-5.5 ; Q35.3 5,3.5 5,1.5 3.75,1.5 ; P2.9 9.144,32.894 8.75,32.5 8.75,26.25 8.5,26 v1(8.5,25) 10.5,25 10.75,24.75 ; v1(9.5,-23) Q54.3 13.397,-23 13.83,-23.433 13.83,-24.387 13.75,-24.467 13.75,-25 15,-25 ; v1(10.15,-10.05) 13.5,-10.05 13.83,-10.38 13.83,-11.63 14.25,-12.05 15,-12.05 ; R12.1 10.75,11.75 12,11.75 12,9.75 12.25,9.5 Q40.3 v1(15.85,9.5) ; R5.1 10.75,24.75 ; v1(13.5,-19.5) 14.5,-20.5 15.5,-20.5 16.305,-21.305 16.305,-22.362 16.5,-22.557 16.5,-25 15,-25 ; v1(14.75,7.75) 14.75,6.75 15.97,5.53 18.062,5.53 18.342,5.25 v1(21,5.25) ; R26.1 15,-25 ; R19.1@15,-11 15,-12.05 ; v1(15.75,-7) 15.75,-7.75 16.25,-8.25 16.25,-12.05 ; v1(15.85,23) Q33.3 12.5,23 12,23.5 12,24.5 11.5,25 11,25 10.75,24.75 ; v1(16.5,-16.75) 16.5,-16.25 17.25,-15.5 17.25,-12.75 16.55,-12.05 16.25,-12.05 ; v1(20.5,30) 24.25,30 24.743,29.507 24.743,26.186 24.5,25.943 24.5,25 ; v1(22.5,-23) 26.5,-23 26.83,-23.33 26.83,-24.58 27.25,-25 28,-25 ; v1(23.15,-10) Q48.3 26.5,-10 26.83,-10.33 26.83,-11.58 27.25,-12 28,-12 R20.1 ; R13.1 23.75,11.25 24,11.5 24.5,11.5 25,11 25,10 25.5,9.5 Q41.3 ; R6.1 23.75,24.75 24,25 24.5,25 ; Q34.3 25.5,23 25,23.5 25,24.5 24.5,25 ; R27.1 28,-25 ; Q41.3@28,9.5 v1(28.95,9.5) ; v1(29,-25) 28,-25 ; v1(36.15,-23) 39.5,-23 39.83,-23.33 39.83,-24.58 40.25,-25 41,-25 R28.1 ; v1(36.15,-10) 39.5,-10 39.83,-10.33 39.83,-11.58 40.25,-12 41,-12 R21.1 ; -3.75,5.5 -3,5.5 -2.75,5.25 v1(-2,5.25) ; -3.5,-1.25 -2,-1.25 ; -2,-1.25 v1(-2,5.25) ; -2,-1.25 -2,-5.25 -1.75,-5.5 3,-5.5 ; v1(-2,5.25) v1(1.75,5.25) 1.75,1.5 3.75,1.5 ; 2,-12.05 2.95,-12.05 3.25,-11.75 3.25,-10.75 3.13,-10.63 3.13,-8 3,-7.87 v1(3,-6.75) 3,-5.5 ; 3,-5.5 3.75,-5.5 ; 15,-12.05 16.25,-12.05
  other v1: -10.25,11
LED_0: D1.1 D1.4 Q1.2 | length 19.1
  Top Layer w0.635: D1.4 D1.1
  Bottom Layer w0.635: D1.1 -33.54,32.04 -32.5,31 -32.5,27.6 Q1.2@-32.5,21.4
LED_1: D2.1 D2.4 Q2.2 | length 19
  Top Layer w0.635: D2.4@-23.46,27.016 D2.1
  Bottom Layer w0.635: D2.1 -20.54,32.04 -19.5,31 -19.5,27.6 Q2.2@-19.5,21.4
LED_2: D3.1 D3.4 Q3.2 | length 19
  Top Layer w0.635: D3.4@-10.46,27.016 D3.1
  Bottom Layer w0.635: D3.1 -7.54,32.04 -6.5,31 -6.5,27.6 Q3.2@-6.5,21.4
LED_3: D4.1 D4.4 Q4.2 | length 19
  Top Layer w0.635: D4.4@2.54,26.98 D4.1@2.54,32.004
  Bottom Layer w0.635: D4.1 5.46,32.04 6.5,31 6.5,27.6 Q4.2@6.5,21.4
LED_4: D5.1 D5.4 Q5.2 | length 19
  Top Layer w0.635: D5.4@15.54,27.016 D5.1
  Bottom Layer w0.635: D5.1 18.46,32.04 19.5,31 19.5,27.6 Q5.2@19.5,21.4
LED_5: D6.1 D6.4 Q6.2 | length 19
  Top Layer w0.635: D6.4@28.54,27.016 D6.1
  Bottom Layer w0.635: D6.1 31.46,32.04 32.5,31 32.5,27.6 Q6.2@32.5,21.4
LED_6: D7.1 D7.4 Q7.2 | length 52.7
  Top Layer w0.635: v1(29.5,3.5) 39,13 39,24.42 D7.4 ; D7.4@41.54,27.016 D7.1
  Bottom Layer w0.635: Q7.2@10.65,3.5 22.25,3.5 22.75,4 27.5,4 28,3.5 v1(29.5,3.5)
LED_7: D8.1 D8.4 Q8.2 | length 19
  Top Layer w0.635: D8.4@-36.5,13.976 D8.1@-36.5,19
  Bottom Layer w0.635: D8.1@-36.5,19 -33.58,19 -32.54,17.96 -32.54,14.56 Q8.2@-32.54,8.36
LED_8: D9.1 D9.4 Q9.2 | length 19
  Top Layer w0.635: D9.4@-23.46,14.016 D9.1
  Bottom Layer w0.635: D9.1 -20.54,19.04 -19.5,18 -19.5,14.6 Q9.2@-19.5,8.4
LED_9: D10.1 D10.4 Q10.2 | length 19
  Top Layer w0.635: D10.4@-10.46,14.016 D10.1
  Bottom Layer w0.635: D10.1 -7.54,19.04 -6.5,18 -6.5,14.6 Q10.2@-6.5,8.4
LED_10: D11.1 D11.4 Q11.2 | length 19
  Top Layer w0.635: D11.4@2.54,14.016 D11.1
  Bottom Layer w0.635: D11.1 5.46,19.04 6.5,18 6.5,14.6 Q11.2@6.5,8.4
LED_11: D12.1 D12.4 Q12.2 | length 19
  Top Layer w0.635: D12.4@15.54,14.016 D12.1
  Bottom Layer w0.635: D12.1 18.46,19.04 19.5,18 19.5,14.6 Q12.2@19.5,8.4
LED_12: D13.1 D13.4 Q13.2 | length 19
  Top Layer w0.635: D13.4@28.54,14.016 D13.1
  Bottom Layer w0.635: D13.1 31.46,19.04 32.5,18 32.5,14.6 Q13.2@32.5,8.4
LED_13: D14.1 D14.4 Q14.2 | length 47.8
  Top Layer w0.635: v1(31.25,-3.5) 31.25,3.67 D14.4 ; D14.4@41.54,14.016 D14.1
  Bottom Layer w0.635: Q14.2@10.65,-3.5 16.85,-3.5 22.25,-3.5 22.75,-4 27.5,-4 28,-3.5 v1(31.25,-3.5)
LED_14: D15.1 D15.4 Q15.2 | length 43.7
  Top Layer w0.635: D15.1@-36.46,-13.6 -36.46,-9.25 -31.25,-4.04 -31.25,0.5 v1(-28.25,3.5)
  Bottom Layer w0.635: D15.4 D15.1@-36.46,-13.832 ; v1(-28.25,3.5) -27.25,3.5 -26.75,4 -20.75,4 -20.25,3.5 -16.85,3.5 Q15.2@-10.65,3.5
LED_15: D16.1 D16.4 Q16.2 | length 22.9
  Bottom Layer w0.635: Q16.2@-32.5,-8.4 -32.5,-16 -31.648,-16.852 -25.648,-16.852 D16.4 ; D16.4@-23.46,-18.984 D16.1
LED_16: D17.1 D17.4 Q17.2 | length 23.2
  Bottom Layer w0.635: Q17.2@-19.5,-8.4 -19.5,-14.6 -19.5,-16.5 -19,-17 -12.5,-17 D17.4 D17.1@-10.46,-14.016
LED_17: D18.1 D18.4 Q18.2 | length 23.2
  Bottom Layer w0.635: Q18.2@-6.5,-8.4 -6.5,-14.6 -6.5,-16.5 -6.148,-16.852 0.352,-16.852 D18.4 D18.1@2.54,-14.016
LED_18: D19.1 D19.4 Q19.2 | length 22.4
  Bottom Layer w0.635: Q19.2@6.5,-8.4 6.5,-16.5 6.852,-16.852 10.648,-16.852 15.392,-16.852 15.54,-17 ; D19.4 15.54,-17 ; D19.1 15.54,-17
LED_19: D20.1 D20.4 Q20.2 | length 22.9
  Bottom Layer w0.635: Q20.2@19.5,-8.4 19.5,-16 20,-16.5 21.5,-16.5 22.5,-15.5 27.056,-15.5 28.54,-14.016 D20.4
LED_20: D21.1 D21.4 Q21.2 | length 23.2
  Bottom Layer w0.635: Q21.2@32.5,-8.4 32.5,-14.6 32.5,-16.5 33,-17 39.5,-17 D21.4 D21.1@41.54,-14.016
LED_21: D22.1 D22.4 Q22.2 | length 50.4
  Top Layer w0.635: D22.1@-36.46,-27 -36.46,-22.96 -34.5,-21 -34.5,-9 v1(-29,-3.5)
  Bottom Layer w0.635: D22.4 D22.1 ; v1(-29,-3.5) -27.75,-3.5 -27.25,-4 -20.75,-4 -20.25,-3.5 -16.85,-3.5 Q22.2@-10.65,-3.5
LED_22: D23.1 D23.4 Q23.2 | length 23.2
  Bottom Layer w0.635: Q23.2@-32.5,-21.4 -32.5,-27.6 -32.5,-29.5 -32,-30 -25.5,-30 D23.4 D23.1@-23.46,-27.016
LED_23: D24.1 D24.4 Q24.2 | length 23.2
  Bottom Layer w0.635: Q24.2@-19.54,-21.44 -19.54,-27.64 -19.54,-29.54 -19.04,-30.04 -12.54,-30.04 -10.5,-32.08 D24.1@-10.5,-27.056
LED_24: D25.1 D25.4 Q25.2 | length 23.2
  Bottom Layer w0.635: Q25.2@-6.5,-21.4 -6.5,-27.6 -6.5,-29.5 -6,-30 0.5,-30 D25.4 D25.1@2.54,-27.016
LED_25: D26.1 D26.4 Q26.2 | length 23.2
  Bottom Layer w0.635: Q26.2@6.5,-21.4 6.5,-27.6 6.5,-29.5 7,-30 13.5,-30 D26.4 D26.1@15.54,-27.016
LED_26: D27.1 D27.4 Q27.2 | length 23.2
  Bottom Layer w0.635: Q27.2@19.46,-21.44 19.46,-27.64 19.46,-29.54 19.96,-30.04 26.46,-30.04 28.5,-32.08 D27.1@28.5,-27.056
LED_27: D28.1 D28.4 Q28.2 | length 23.2
  Bottom Layer w0.635: Q28.2@32.5,-21.4 32.5,-27.6 32.5,-29.5 33,-30 39.5,-30 D28.4 D28.1@41.54,-27.016
NetQ1_3: Q1.3 Q29.1 R1.2 | length 9.4
  Bottom Layer w0.254: R1.2 -41.5,21 -41,20.5 -39.5,20.5 -39,21 -39,21.95 Q29.1 -36.75,22.05 -36.1,21.4 Q1.3
NetQ2_3: Q2.3 Q30.1 R2.2 | length 9.2
  Bottom Layer w0.254: R2.2 -28.25,21 -27.75,20.5 -26.5,20.5 -26,21 -26,21.95 Q30.1 -23.75,22.05 -23.1,21.4 Q2.3
NetQ3_3: Q3.3 Q31.1 R3.2 | length 9.2
  Bottom Layer w0.254: R3.2 -15.25,21 -14.75,20.5 -13.5,20.5 -13,21 -13,21.95 Q31.1 -10.75,22.05 -10.1,21.4 Q3.3
NetQ4_3: Q4.3 Q32.1 R4.2 | length 9.2
  Bottom Layer w0.254: R4.2 -2.25,21 -1.75,20.5 -0.5,20.5 0,21 0,21.95 Q32.1 2.25,22.05 2.9,21.4 Q4.3
NetQ5_3: Q5.3 Q33.1 R5.2 | length 8.3
  Bottom Layer w0.254: R5.2 10.75,21.25 11,21 12.5,21 13.1,21.6 Q33.1 15.25,22.05 15.9,21.4 Q5.3
NetQ6_3: Q6.3 Q34.1 R6.2 | length 9.2
  Bottom Layer w0.254: R6.2 23.75,21 24.25,20.5 25.5,20.5 26,21 26,21.95 Q34.1 28.25,22.05 28.9,21.4 Q6.3
NetQ7_3: Q7.3 Q35.1 R7.2 | length 9.6
  Bottom Layer w0.254: R7.2 3.75,5.5 4,5.75 4.5,5.75 5.8,4.45 Q35.1 8.7,4.45 9,4.75 9,5.5 9.3,5.8 Q7.3
NetQ8_3: Q8.3 Q36.1 R8.2 | length 7.7
  Bottom Layer w0.254: R8.2@-41.5,8.55 -41.5,8.025 -41.475,8 -40.5,8 -39.95,8.55 -36.75,8.55 -36.1,7.9 Q8.3
NetQ9_3: Q9.3 Q37.1 R9.2 | length 9.2
  Bottom Layer w0.254: R9.2 -28.25,7.5 -27.75,7 -26.5,7 -26,7.5 -26,8.45 Q37.1 -23.75,8.55 -23.1,7.9 Q9.3
NetQ10_3: Q10.3 Q38.1 R10.2 | length 9.2
  Bottom Layer w0.254: R10.2 -15.25,7.5 -14.75,7 -13.5,7 -13,7.5 -13,8.45 Q38.1 -10.75,8.55 -10.1,7.9 Q10.3
NetQ11_3: Q11.3 Q39.1 R11.2 | length 9.2
  Bottom Layer w0.254: R11.2 -2.25,7.5 -1.75,7 -0.5,7 0,7.5 0,8.45 Q39.1 2.25,8.55 2.9,7.9 Q11.3
NetQ12_3: Q12.3 Q40.1 R12.2 | length 9.2
  Bottom Layer w0.254: R12.2 10.75,7.5 11.25,7 12.5,7 13,7.5 13,8.45 Q40.1 15.25,8.55 15.9,7.9 Q12.3
NetQ13_3: Q13.3 Q41.1 R13.2 | length 9.2
  Bottom Layer w0.254: R13.2 23.75,7.5 24.25,7 25.5,7 26,7.5 26,8.45 Q41.1 28.25,8.55 28.9,7.9 Q13.3
NetQ14_3: Q14.3 Q42.1 R14.2 | length 9.6
  Bottom Layer w0.254: R14.2 3.75,-1.5 4,-1.25 4.5,-1.25 5.8,-2.55 Q42.1 8.7,-2.55 9,-2.25 9,-1.5 9.3,-1.2 Q14.3
NetQ15_3: Q15.3 Q43.1 R15.2 | length 9.6
  Bottom Layer w0.254: Q15.3 -9.3,1.2 -9,1.5 -9,2.25 -8.7,2.55 Q43.1 -5.8,2.55 -4.5,1.25 -4,1.25 -3.75,1.5 R15.2
NetQ16_3: Q16.3 Q44.1 R16.2 | length 8.3
  Bottom Layer w0.254: Q16.3 -28.85,-8.15 -27.95,-9.05 Q44.1 -26.1,-8.35 -25.75,-8 -24.25,-8 -24,-8.25 R16.2
NetQ17_3: Q17.3 Q45.1 R17.2 | length 8.3
  Bottom Layer w0.254: Q17.3 -15.85,-8.15 -14.95,-9.05 Q45.1 -13.1,-8.35 -12.75,-8 -11.25,-8 -11,-8.25 R17.2
NetQ18_3: Q18.3 Q46.1 R18.2 | length 8.3
  Bottom Layer w0.254: Q18.3 -2.85,-8.15 -1.95,-9.05 -0.1,-9.05 -0.1,-8.35 0.25,-8 1.75,-8 2,-8.25 R18.2
NetQ19_3: Q19.3 Q47.1 R19.2 | length 8.3
  Bottom Layer w0.254: Q19.3 10.15,-8.15 11.05,-9.05 Q47.1 12.9,-8.35 13.25,-8 14.75,-8 15,-8.25 R19.2
NetQ20_3: Q20.3 Q48.1 R20.2 | length 8.3
  Bottom Layer w0.254: Q20.3 23.15,-8.15 24.05,-9.05 Q48.1 25.9,-8.35 26.25,-8 27.75,-8 28,-8.25 R20.2
NetQ21_3: Q21.3 Q49.1 R21.2 | length 8.3
  Bottom Layer w0.254: Q21.3 36.15,-8.15 37.05,-9.05 Q49.1 38.9,-8.35 39.25,-8 40.75,-8 41,-8.25 R21.2
NetQ22_3: Q22.3 Q50.1 R22.2 | length 9.6
  Bottom Layer w0.254: Q22.3@-10.5,-5.75 -9.15,-5.75 -8.85,-5.45 -8.85,-4.7 -8.55,-4.4 Q50.1 -5.65,-4.4 -4.35,-5.7 -3.85,-5.7 -3.6,-5.45 R22.2
NetQ23_3: Q23.3 Q51.1 R23.2 | length 8.3
  Bottom Layer w0.254: Q23.3 -28.85,-21.15 -27.95,-22.05 Q51.1 -26.1,-21.35 -25.75,-21 -24.25,-21 -24,-21.25 R23.2
NetQ24_3: Q24.3 Q52.1 R24.2 | length 8.3
  Bottom Layer w0.254: Q24.3 -15.89,-21.15 -14.99,-22.05 Q52.1 -13.14,-21.35 -12.79,-21 -11.29,-21 -11.04,-21.25 R24.2@-11.04,-22.05
NetQ25_3: Q25.3 Q53.1 R25.2 | length 8.3
  Bottom Layer w0.254: Q25.3 -2.85,-21.15 -1.95,-22.05 Q53.1 -0.1,-21.35 0.25,-21 1.75,-21 2,-21.25 R25.2
NetQ26_3: Q26.3 Q54.1 R26.2 | length 8.3
  Bottom Layer w0.254: Q26.3 10.15,-21.15 11.05,-22.05 Q54.1 12.9,-21.35 13.25,-21 14.75,-21 15,-21.25 R26.2
NetQ27_3: Q27.3 Q55.1 R27.2 | length 8.3
  Bottom Layer w0.254: Q27.3 23.11,-21.15 24.01,-22.05 Q55.1 25.86,-21.35 26.21,-21 27.71,-21 27.96,-21.25 R27.2@27.96,-22.05
NetQ28_3: Q28.3 Q56.1 R28.2 | length 8.3
  Bottom Layer w0.254: Q28.3 36.15,-21.15 37.05,-22.05 Q56.1 38.9,-21.35 39.25,-21 40.75,-21 41,-21.25 R28.2

## Polygon pours and split planes (outlines as drawn)
GND on Top Layer "Top Layer-No Net" (solid, remove dead copper, pour order 0): -43,-34 -43,-9.5 cw(c-41,-9.5) -41,-7.5 ccw(c-41,0) -41,7.5 cw(c-41,9.5) -43,9.5 -43,34 cw(c-41,34) -41,36 41,36 cw(c41,34) 43,34 43,33.5 43,9.5 cw(c41,9.5) 41,7.5 ccw(c41,0) 41,-7.5 cw(c41,-9.5) 43,-9.5 43,-34 cw(c41,-34) 41,-36 -41,-36 cw(c-41,-34)
GND on Bottom Layer "Top Layer-No Net1" (solid, pour order 1): -43,-34 -43,-9.5 cw(c-41,-9.5) -41,-7.5 ccw(c-41,0) -41,7.5 cw(c-41,9.5) -43,9.5 -43,34 cw(c-41,34) -41,36 41,36 cw(c41,34) 43,34 43,33.5 43,9.5 cw(c41,9.5) 41,7.5 ccw(c41,0) 41,-7.5 cw(c41,-9.5) 43,-9.5 43,-34 cw(c41,-34) 41,-36 -41,-36 cw(c-41,-34)

## Silkscreen, mask and mechanical layers (free items; w line width, h text height)
Top Overlay:
  text "LOWCOSTLABS.COM.AU" at -34,8 h4
  text "FORD XB-XC COUPE" at -29.267,3.5 h4
  text "LED MODULE" at -18.785,-1.5 h4
  text "a" at -21,-17.5 h30
Mechanical 1:
  circle w0.2: c-25,0 r1.5
  circle w0.2: c-25,0 r3
  circle w0.2: c25,0 r3
  circle w0.2: c25,0 r1.5
  circle w0.2: c-32.5,23 r3
  circle w0.2: c-32.5,23 r1.5
  circle w0.2: c32.5,23 r1.5
  circle w0.2: c32.5,23 r3
  circle w0.2: c32.5,-23 r1.5
  circle w0.2: c32.5,-23 r3
  circle w0.2: c-32.5,-23 r1.5
  circle w0.2: c-32.5,-23 r3
  lines w0.2: -43,34 cw(c-41,34) -41,36 41,36 cw(c41,34) 43,34 43,33.5 43,9.5 cw(c41,9.5) 41,7.5 ccw(c41,0) 41,-7.5 cw(c41,-9.5) 43,-9.5 43,-34 cw(c41,-34) 41,-36 -41,-36 cw(c-41,-34) -43,-34 -43,-33.5 -43,-9.5 cw(c-41,-9.5) -41,-7.5 ccw(c-41,0) -41,7.5 cw(c-41,9.5) -43,9.5 -43,34 ; -43,34 -43,34
Mechanical 2:
  lines w0.1: -9.144,-34.544 0,-34.544 9.144,-34.544 ; 9.144,34.544 0,34.544 ; 0,34.544 -9.144,34.544 0,34.544
  lines w0.2: -43,10 43,10 ; -39,-30.5 -39,-28.5 ; -39,-29.5 -26,-29.5 -13,-29.5 0,-29.5 ; -39,-17.5 -39,-15.5 ; -39,-16.5 -26,-16.5 -13,-16.5 0,-16.5 ; -39,15.5 -39,17.5 ; -39,16.5 -26,16.5 -13,16.5 0,16.5 ; -39,28.5 -39,30.5 ; -33.25,23 -32.5,23 ; -32.5,22.25 -32.5,23 ; -32.5,23.75 -32.5,23 ; -31.75,23 -32.5,23 ; -26,-30.5 -26,-28.5 ; -26,-17.5 -26,-15.5 ; -26,15.5 -26,17.5 ; -26,28.5 -26,30.5 ; -25,0 0,0 ; -13,-30.5 -13,-28.5 ; -13,-17.5 -13,-15.5 ; -13,15.5 -13,17.5 ; -13,28.5 -13,30.5 ; 0,-36 0,-29.5 ; 0,-10 0,0 ; 0,36 0,29.5 ; 0.555,0 0,0 ; 13,-30.5 13,-28.5 ; 13,-17.5 13,-15.5 ; 13,15.5 13,17.5 ; 13,28.5 13,30.5 ; 25,0 0,0 ; 26,-30.5 26,-28.5 ; 26,-17.5 26,-15.5 ; 26,15.5 26,17.5 ; 26,28.5 26,30.5 ; 39,-30.5 39,-28.5 ; 39,-29.5 26,-29.5 13,-29.5 0,-29.5 ; 39,-17.5 39,-15.5 ; 39,-16.5 26,-16.5 13,-16.5 0,-16.5 ; 39,15.5 39,17.5 ; 39,16.5 26,16.5 13,16.5 0,16.5 ; 39,28.5 39,30.5 ; 39,29.5 26,29.5 13,29.5 0,29.5 ; -26,29.5 -39,29.5 -26,29.5 ; -26,29.5 -13,29.5 0,29.5 ; -1,-16.5 1,-16.5 ; -1,-16.5 1,-16.5 ; -1,-16.5 1,-16.5 ; -1,16.5 1,16.5 ; -1,16.5 1,16.5 ; -1,16.5 1,16.5 ; 0,-29.5 0,-16.5 ; 0,0 0,10 0,16.5 ; 0,16.5 0,29.5 ; -1,-29.5 1,-29.5 -1,-29.5 ; -1,29.5 1,29.5 -1,29.5
Mechanical 3:
  lines w0.2: -43,34 cw(c-41,34) -41,36 41,36 cw(c41,34) 43,34 43,33.5 43,9.5 cw(c41,9.5) 41,7.5 ccw(c41,0) 41,-7.5 cw(c41,-9.5) 43,-9.5 43,-34 cw(c41,-34) 41,-36 -41,-36 cw(c-41,-34) -43,-34 -43,-33.5 -43,-9.5 cw(c-41,-9.5) -41,-7.5 ccw(c-41,0) -41,7.5 cw(c-41,9.5) -43,9.5 -43,34 ; -43,34 -43,34